# Altium PCB Insole_ver1.PcbDoc (part 1 of 2)
Units mil, origin at the board's own origin, x right, y up, seen from the top; angles counter-clockwise.
Board outline 8634.93 x 10258.5 mil, 2 copper layers (Top Layer, Bottom Layer); 254 components, 50 nets, 823 pads, 0 vias.
Unrouted connection lines stored in the file: 475.
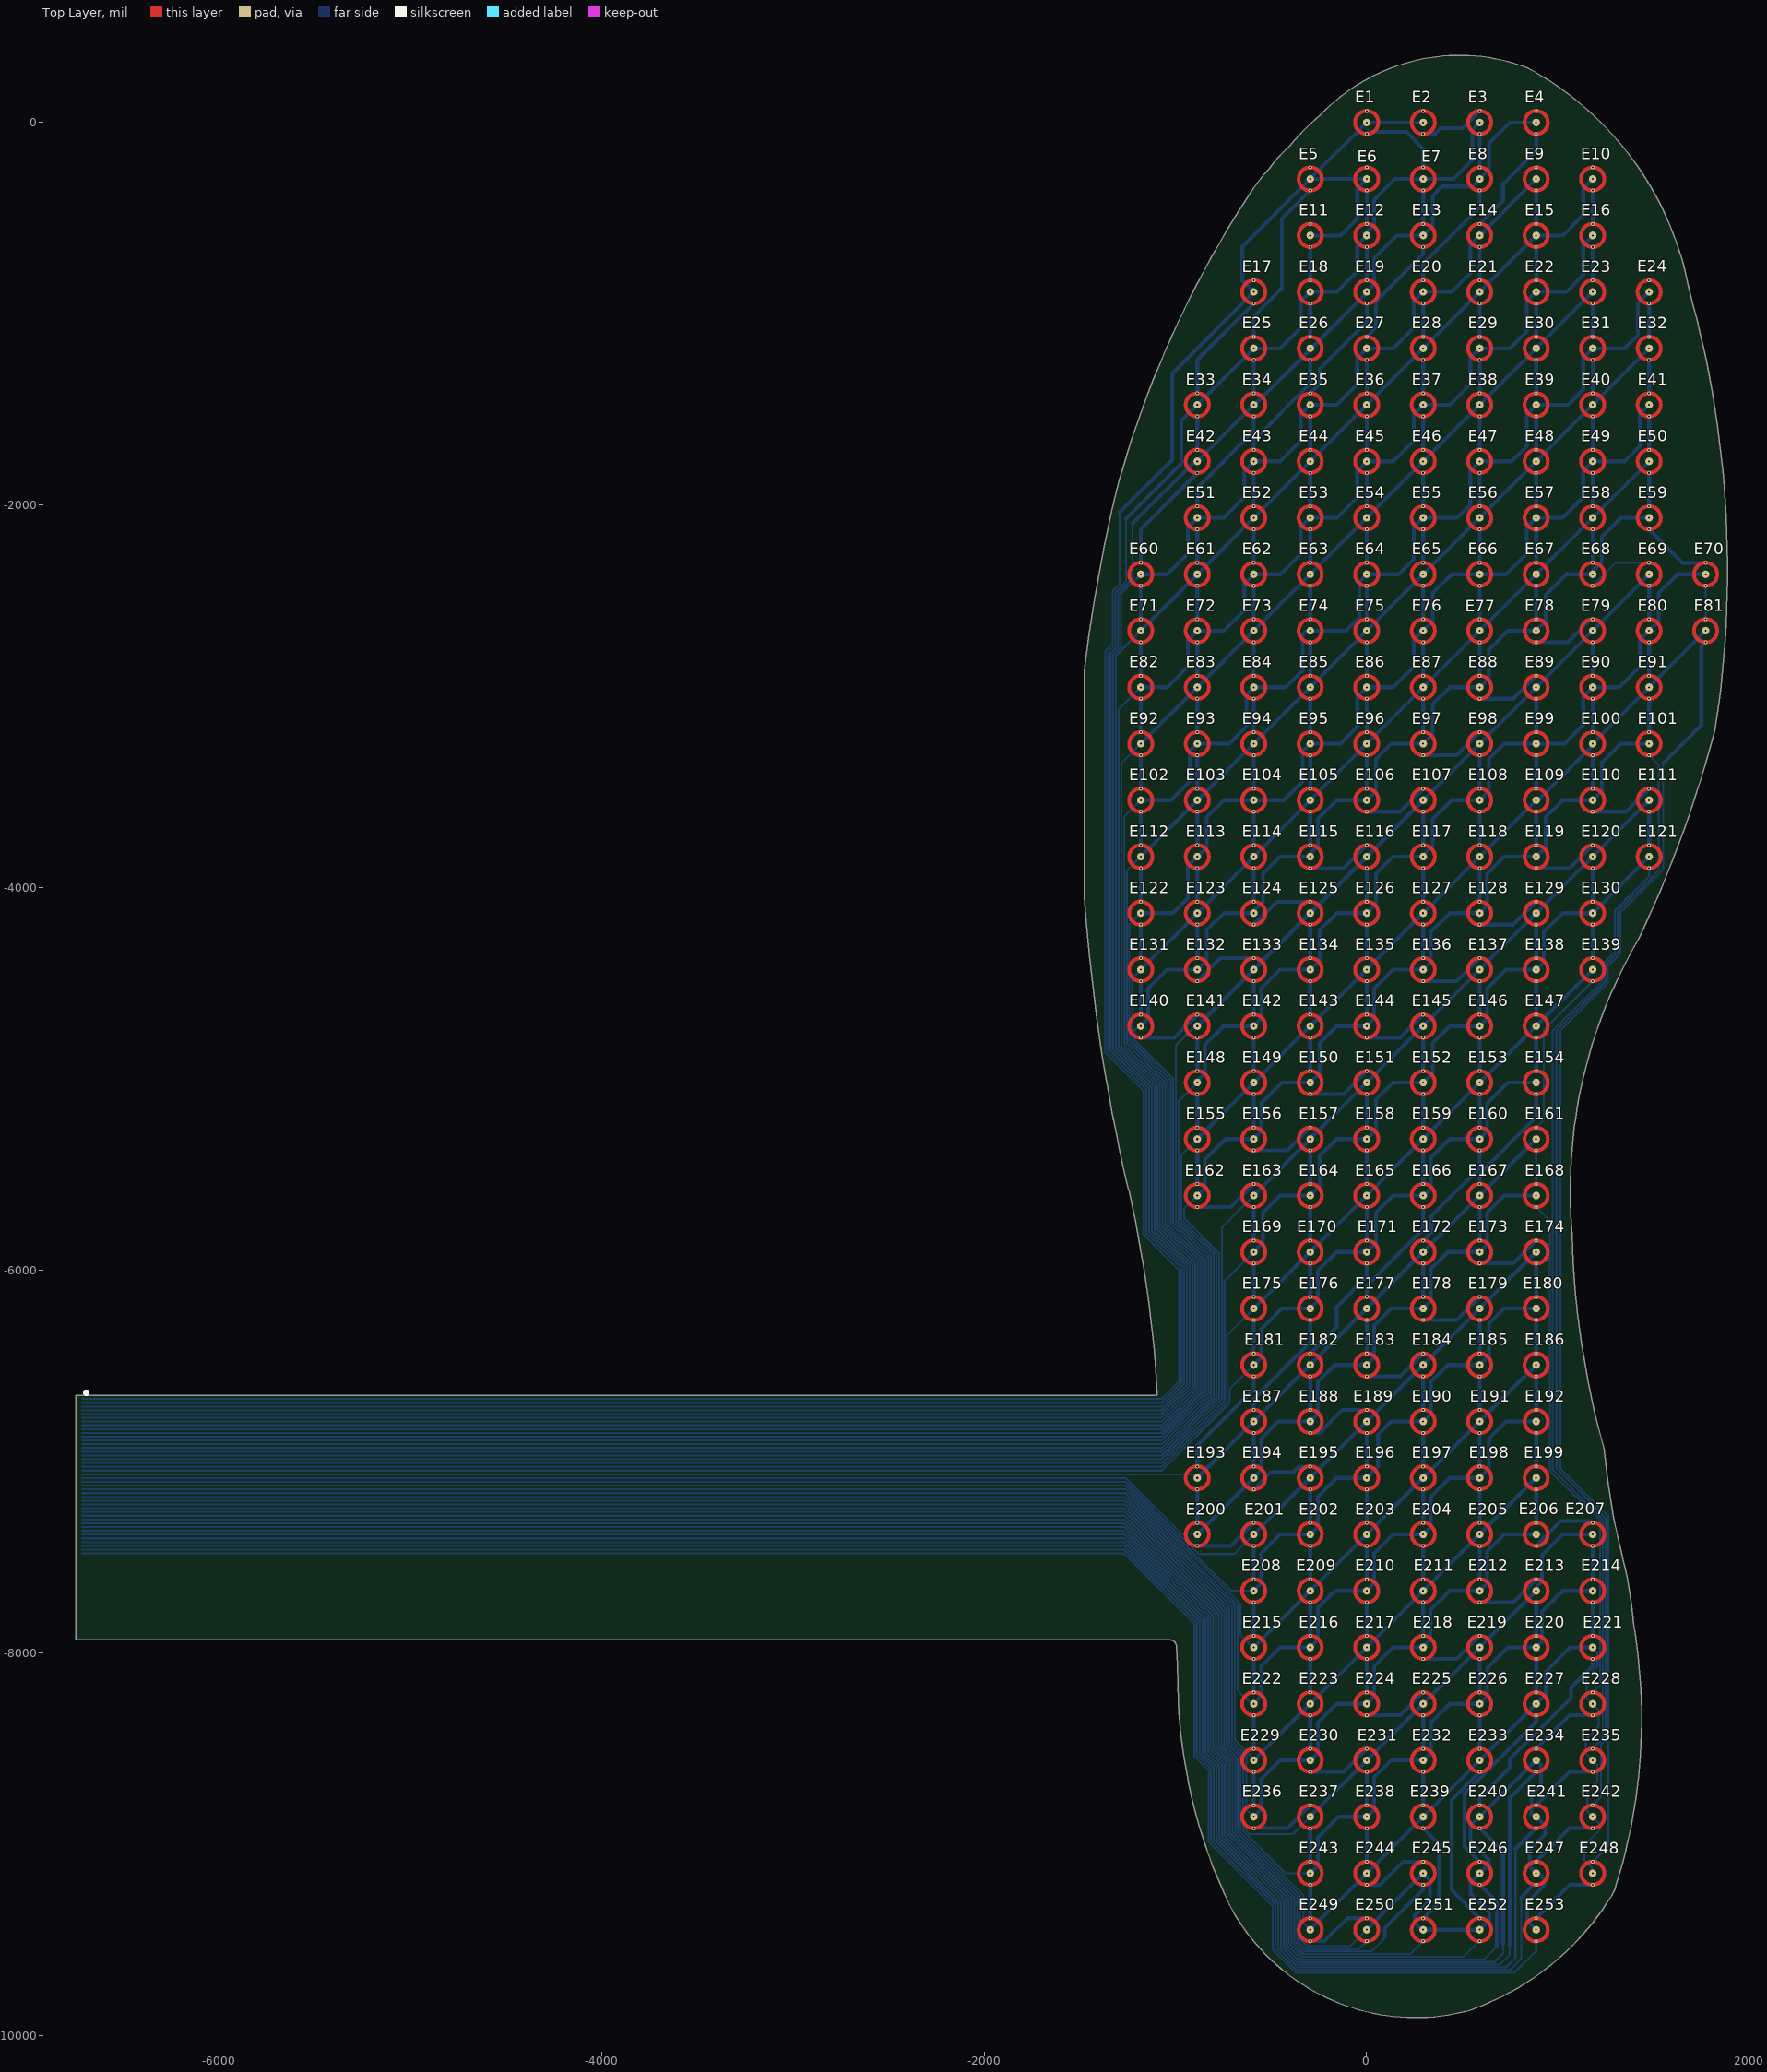
[diagram p0: Top Layer view]
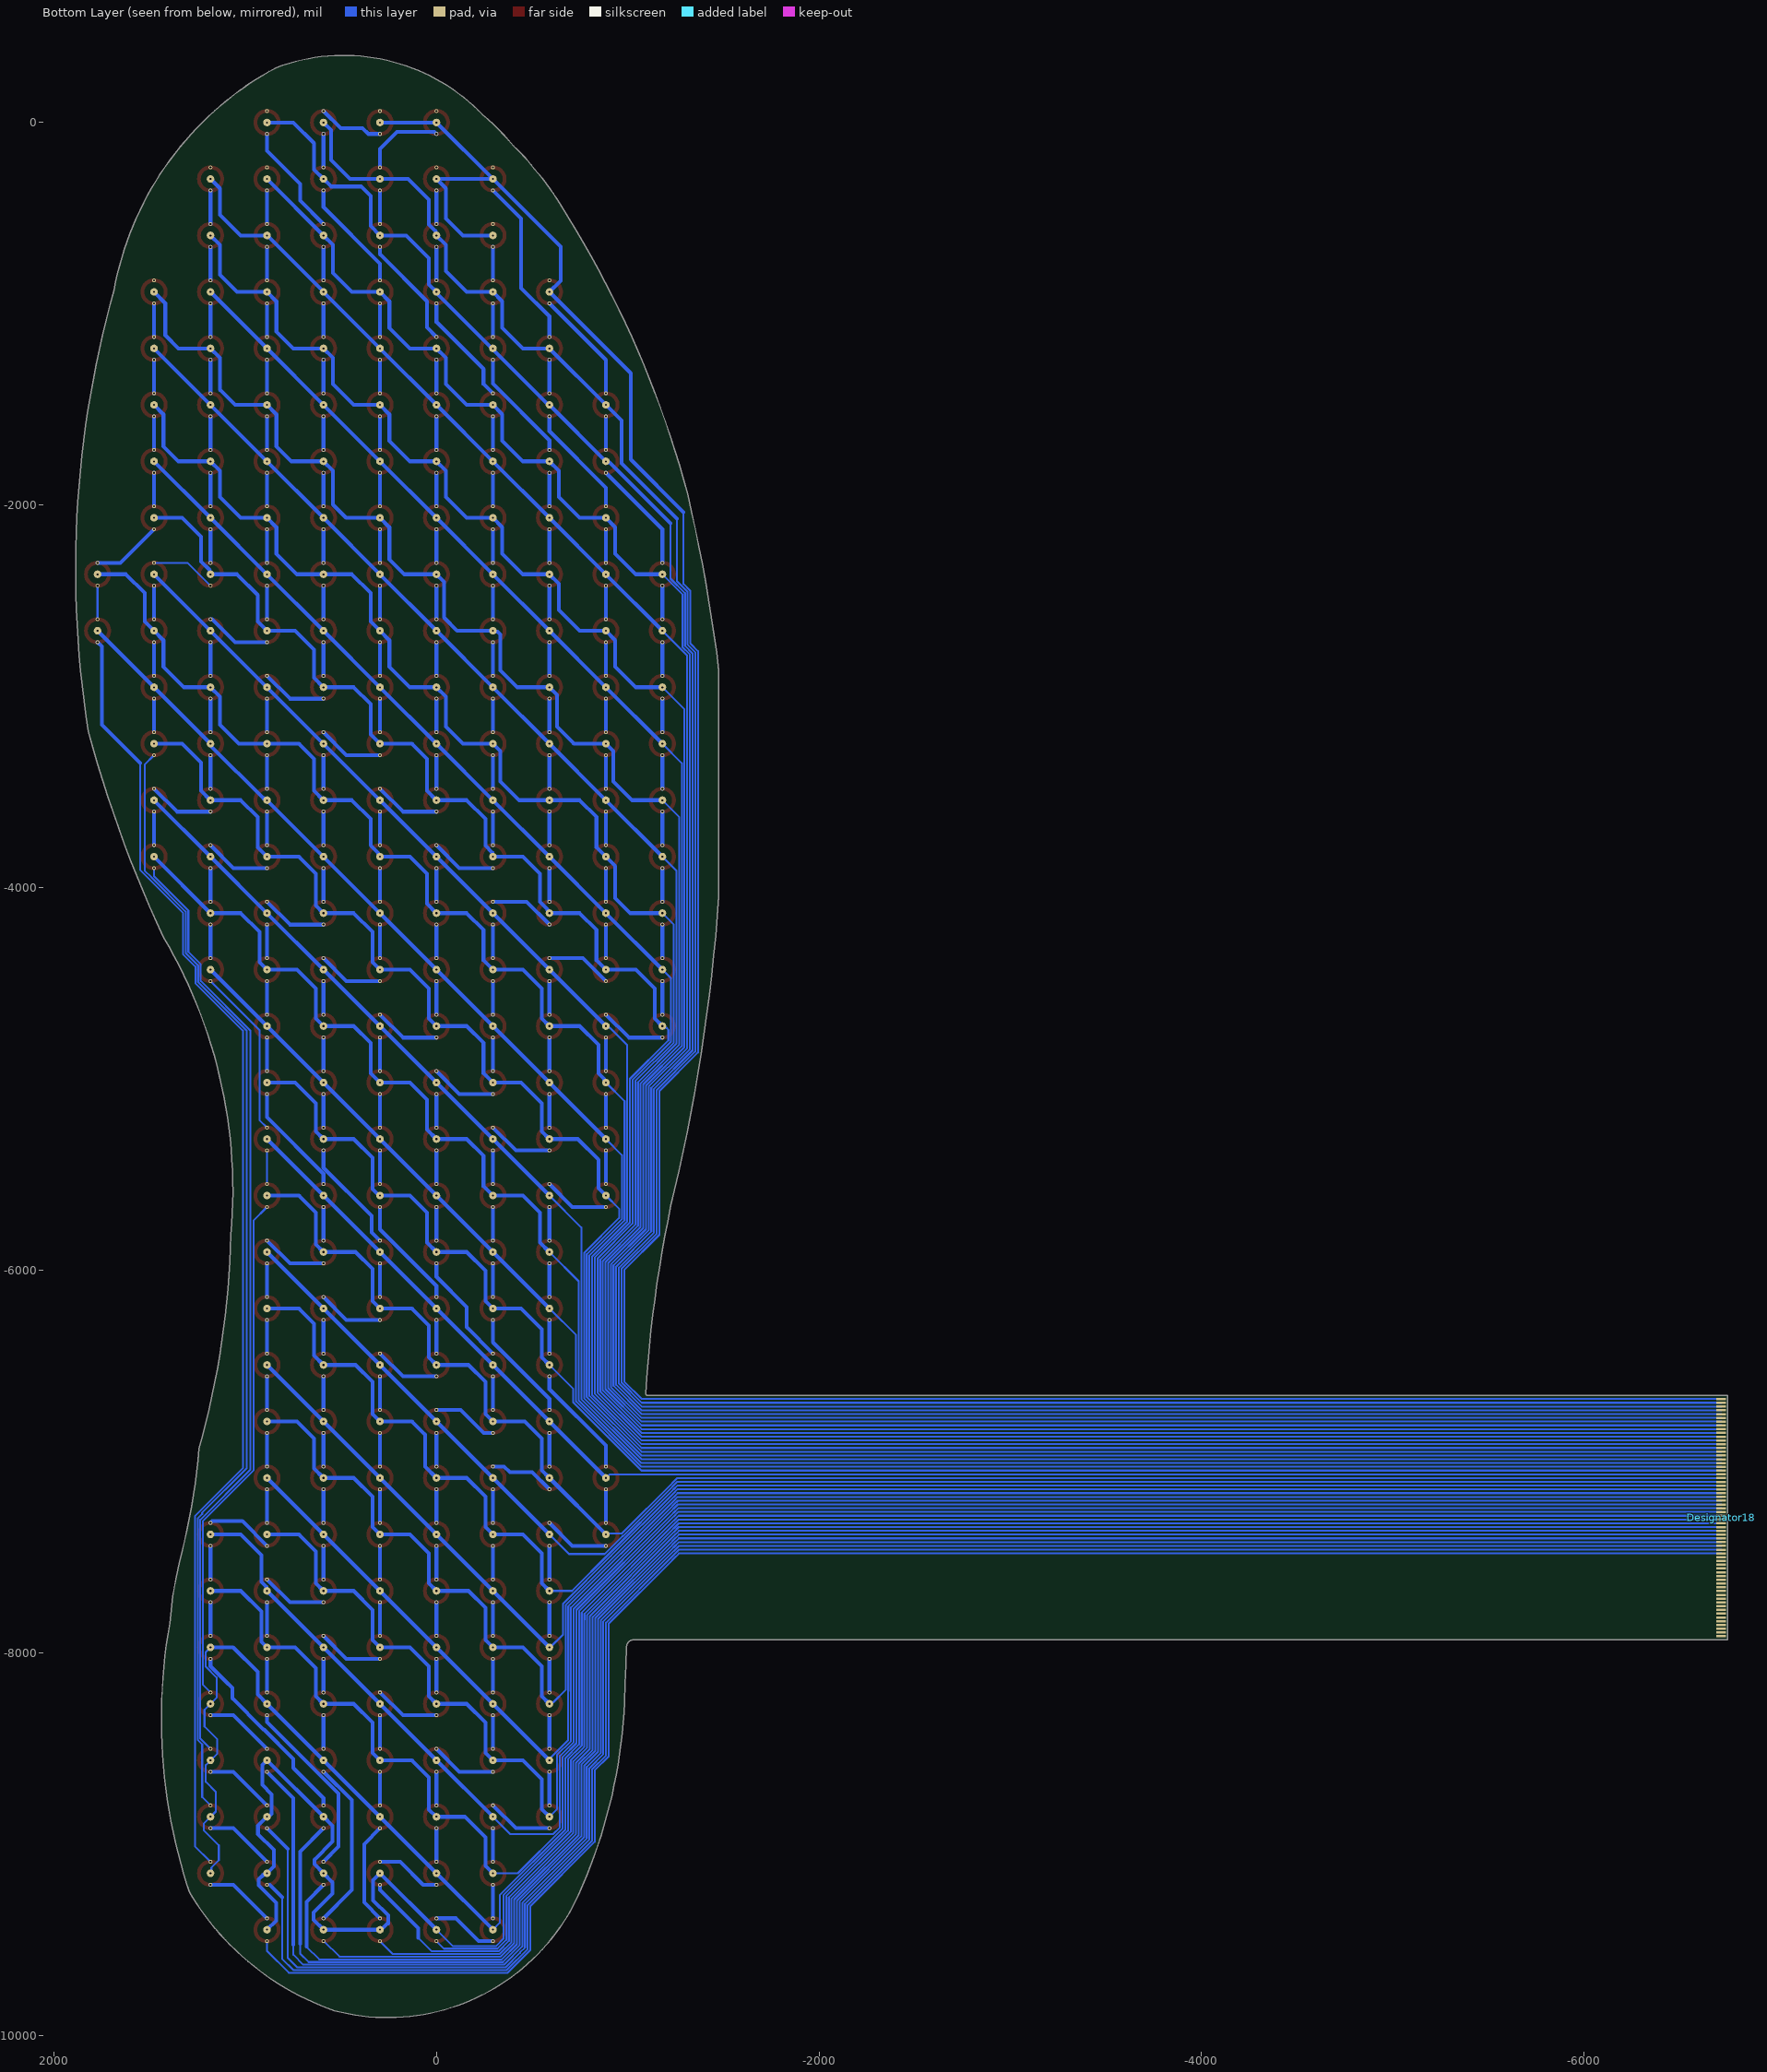
[diagram p1: Bottom Layer view, seen from below]

## Layer stack, top to bottom
Top Solder: solder mask 0.4, Solder Resist, Dk 3.5
Top Layer: signal copper 1.4
Dielectric 1: dielectric 12.6, FR-4, Dk 4.8
Bottom Layer: signal copper 1.4
Bottom Solder: solder mask 0.4, Solder Resist, Dk 3.5

## Board outline
-6749.02,-7933.46 -6749.02,-7924.29 -6749.02,-6664.33 -6749.02,-6654.33 -1100.39,-6654.33 ccw(c-1101.93,-6646.9) -1094.5,-6645.36 ccw(c-7729.36,-7029.93) -1243,-5582.02 -1244.89,-5582.15 cw(c8166.3,-3378.54) -1476.36,-4045.95 -1476.36,-2864.85 cw(c7311.45,-3944.72) -1313.08,-1942.41 cw(c3918.94,-3341.98) -645.19,-426.24 cw(c298.66,-974.06) -512.56,-244.08 cw(c175.46,-757.6) -401.59,-121.92 cw(c543.88,-896.94) -242,39.53 cw(c485.96,-656.21) 835.98,287.96 cw(c52.22,-1175.58) 1685.24,-876.42 cw(c-3527.57,-2337.08) 1819.32,-3184.24 cw(c-4531.03,-1475.13) 1426.2,-4260.7 ccw(c3666.75,-5584.92) 1074.31,-5814.86 ccw(c5587.75,-5713.61) 1240.88,-6932.71 ccw(c4856.2,-6611.73) 1331.49,-7477.73 cw(c-856.54,-8039.02) 1394.08,-7846.04 cw(c-1473.16,-8345.15) 1304.04,-9215.4 1303.8,-9215.35 cw(c1118,-9169.77) 1274.97,-9279.14 cw(c65,-8526.05) 531.52,-9872.72 cw(c255.92,-8809.73) -718.36,-9316.36 cw(c1754.38,-8132.87) -984.15,-8257.65 ccw(c-12790.3,-8516.48) -994.08,-7967.56 ccw(c-1029.84,-7969.22) -1031.5,-7933.46
board region "Layer Stack Region 1": -3866.14,-6654.33 -1261.84,-6654.33 -1275.43,-7933.47 -3854.34,-7933.47
board region "Layer Stack Region 1": -1261.84,-6654.33 -1100.39,-6654.33 -1098.97,-6653.89 -1096.52,-6652.22 -1094.9,-6649.74 -1094.34,-6646.83 -1094.5,-6645.36 -1098.73,-6578.31 -1109.21,-6444.37 -1122.4,-6310.67 -1138.29,-6177.26 -1156.87,-6044.2 -1178.14,-5911.55 -1202.09,-5779.35 -1228.7,-5647.66 -1243,-5582.02 -1244.89,-5582.15 -1267.05,-5487.51 -1307.56,-5297.37 -1344.23,-5106.45 -1377.06,-4914.83 -1406.02,-4722.59 -1431.12,-4529.81 -1452.33,-4336.56 -1469.65,-4142.92 -1476.36,-4045.95 -1476.36,-2864.85 -1469.22,-2806.71 -1453.39,-2690.63 -1436.03,-2574.77 -1417.14,-2459.15 -1396.72,-2343.79 -1374.77,-2228.71 -1351.31,-2113.92 -1326.33,-1999.46 -1313.08,-1942.41 -1295.17,-1875.45 -1255.93,-1742.51 -1213.31,-1610.61 -1167.33,-1479.85 -1118.01,-1350.3 -1065.39,-1222.06 -1009.51,-1095.21 -950.41,-969.83 -888.11,-846 -822.67,-723.81 -754.12,-603.33 -682.51,-484.65 -645.19,-426.24 -631.03,-401.83 -600.21,-354.54 -566.98,-308.91 -531.44,-265.06 -512.57,-244.08 -500.2,-227.52 -473.92,-195.62 -446.13,-165.03 -416.9,-135.81 -401.59,-121.92 -383.58,-99.94 -345.53,-57.7 -305.57,-17.27 -263.77,21.26 -242,39.53 -221.77,60.7 -178.9,100.62 -133.79,137.98 -86.59,172.66 -37.45,204.53 13.46,233.5 65.97,259.46 119.9,282.32 175.06,302.01 231.28,318.46 288.36,331.61 346.1,341.42 404.32,347.87 462.81,350.91 521.39,350.56 579.84,346.8 637.97,339.64 695.59,329.13 752.51,315.28 808.52,298.14 835.98,287.96 868.84,270.37 932.91,232.26 995.21,191.31 1055.61,147.61 1113.99,101.24 1170.23,52.3 1224.21,0.88 1275.83,-52.9 1324.99,-108.95 1371.58,-167.15 1415.51,-227.38 1456.69,-289.53 1495.04,-353.46 1530.49,-419.04 1562.95,-486.15 1592.37,-554.65 1618.69,-624.41 1641.85,-695.27 1661.81,-767.1 1678.52,-839.75 1685.24,-876.42 1704.88,-946.52 1740.38,-1087.74 1772.08,-1229.86 1799.93,-1372.78 1823.94,-1516.4 1844.07,-1660.62 1860.32,-1805.32 1872.68,-1950.41 1881.12,-2095.77 1885.65,-2241.31 1886.27,-2386.92 1882.97,-2532.5 1875.76,-2677.93 1864.64,-2823.12 1849.62,-2967.95 1830.71,-3112.33 1819.32,-3184.24 1800.68,-3253.5 1760.39,-3391.16 1717.11,-3527.91 1670.85,-3663.69 1621.65,-3798.42 1569.52,-3932.05 1514.48,-4064.51 1456.57,-4195.74 1426.2,-4260.7 1400.87,-4304.52 1352.8,-4393.59 1308.23,-4484.46 1267.23,-4576.99 1229.85,-4671.05 1196.16,-4766.49 1166.21,-4863.17 1140.04,-4960.94 1117.69,-5059.65 1099.19,-5159.16 1084.58,-5259.31 1073.87,-5359.96 1067.08,-5460.94 1064.23,-5562.11 1065.31,-5663.32 1070.33,-5764.41 1074.31,-5814.86 1075.61,-5862.06 1079.7,-5956.4 1085.77,-6050.63 1093.8,-6144.72 1103.8,-6238.61 1115.76,-6332.28 1129.68,-6425.68 1145.55,-6518.76 1163.36,-6611.5 1183.11,-6703.84 1204.78,-6795.75 1228.37,-6887.18 1240.89,-6932.71 1244.11,-6967.12 1251.53,-7035.85 1260.26,-7104.43 1270.3,-7172.82 1281.63,-7241.02 1294.27,-7308.98 1308.19,-7376.69 1323.4,-7444.13 1331.49,-7477.73 1343.11,-7523.02 1362.58,-7614.49 1378.25,-7706.69 1390.08,-7799.45 1394.08,-7846.04 1401.5,-7888.7 1413.81,-7974.41 1423.56,-8060.45 1430.75,-8146.74 1435.36,-8233.21 1437.41,-8319.78 1436.87,-8406.37 1433.76,-8492.9 1428.08,-8579.31 1419.83,-8665.51 1409.02,-8751.42 1395.66,-8836.97 1379.76,-8922.09 1361.34,-9006.7 1340.41,-9090.72 1316.98,-9174.09 1303.8,-9215.35 1301.71,-9223.9 1295.96,-9240.55 1288.7,-9256.6 1280,-9271.91 1274.97,-9279.14 1258.95,-9304.88 1224.75,-9354.94 1188.45,-9403.51 1150.12,-9450.49 1109.83,-9495.8 1067.65,-9539.35 1023.65,-9581.07 977.92,-9620.88 930.54,-9658.71 881.6,-9694.49 831.17,-9728.16 779.36,-9759.65 726.26,-9788.91 671.96,-9815.89 616.56,-9840.53 560.16,-9862.8 531.52,-9872.72 501.73,-9880.45 441.37,-9892.53 380.43,-9901.22 319.1,-9906.48 257.57,-9908.3 196.04,-9906.67 134.69,-9901.59 73.73,-9893.09 13.33,-9881.18 -46.3,-9865.91 -104.98,-9847.32 -162.53,-9825.48 -218.77,-9800.45 -273.51,-9772.31 -326.6,-9741.14 -377.85,-9707.05 -427.11,-9670.15 -474.24,-9630.54 -519.06,-9588.35 -561.46,-9543.72 -601.29,-9496.79 -638.42,-9447.7 -672.75,-9396.6 -704.16,-9343.67 -718.36,-9316.36 -738.13,-9275.06 -774.89,-9191.17 -808.83,-9106.11 -839.9,-9019.96 -868.08,-8932.82 -893.34,-8844.78 -915.64,-8755.95 -934.96,-8666.43 -951.28,-8576.31 -964.58,-8485.7 -974.84,-8394.69 -982.07,-8303.39 -984.15,-8257.65 -985,-8221.38 -987.04,-8148.84 -989.52,-8076.32 -992.45,-8003.81 -994.08,-7967.56 -994.41,-7964.07 -996.1,-7957.26 -999.08,-7950.9 -1003.25,-7945.26 -1008.43,-7940.53 -1014.44,-7936.91 -1021.04,-7934.52 -1027.98,-7933.47 -1031.5,-7933.47 -1275.43,-7933.47
board region "Layer Stack Region 1": -3854.34,-7933.47 -6749.02,-7933.47 -6749.02,-7924.29 -6749.02,-6664.33 -6749.02,-6654.33 -3866.14,-6654.33

## Design rules (kind name [scope] priority, off if disabled: settings)
Clearance [All] p1: gap=10 ignorepadtopadclearanceinfootprint=FALSE except(0: Arc-Hole Track-Hole SMDPad-Hole THPad-Hole Via-Hole Fill-Hole Poly-Hole Region-Hole Text-Hole; 4: Arc-Arc Arc-Track Track-Track)
DiffPairsRouting [All] p1: maxlimit=10 minlimit=10 mostfreqgap=10 toplayer_minwidth=15 toplayer_maxwidth=15 toplayer_prefwidth=15 bottomlayer_minwidth=15 bottomlayer_maxwidth=15 bottomlayer_prefwidth=15 substack1={6D9DD50E-99D7-4FCE-B177-F3C0DD92A880} toplayer_{6d9dd50e-99d7-4fce-b177-f3c0dd92a880}_minwidth=15 toplayer_{6d9dd50e-99d7-4fce-b177-f3c0dd92a880}_maxwidth=15 toplayer_{6d9dd50e-99d7-4fce-b177-f3c0dd92a880}_prefwidth=15 bottomlayer_{6d9dd50e-99d7-4fce-b177-f3c0dd92a880}_minwidth=15 bottomlayer_{6d9dd50e-99d7-4fce-b177-f3c0dd92a880}_maxwidth=15 bottomlayer_{6d9dd50e-99d7-4fce-b177-f3c0dd92a880}_prefwidth=15 maxuncoupledlength=500
PolygonConnect [All] p1: connectstyle=Relief reliefconductorwidth=10 reliefentries=4 polygonreliefangle="90 Angle" airgapwidth=10
RoutingVias [All] p1: holewidth=28 width=50 viastyle="Through Hole" minholewidth=28 minwidth=50 maxholewidth=28 maxwidth=50
SolderMaskExpansion [All] p1: expansion=4 istentingtop=FALSE
Width [All] p1: maxlimit=10 minlimit=10 preferedwidth=10 substack1={6D9DD50E-99D7-4FCE-B177-F3C0DD92A880}
29 further rules are at their usual default settings.

## Classes and differential pairs
net class ROUTE: Col1 Col2 Col3 Col4 Col5 Col6 Col7 Col8 Col9 Col10 Col11 Col12 Col13 Col14 Col15 Col16 Col17 Col18 Row1 Row2 Row3 Row4 Row5 Row6 Row7 Row8 Row9 Row10 Row11 Row12 Row13 Row14 Row15 Row16 Row17 Row18 Row19 Row20 Row21 Row22 Row23 Row24 Row25 Row26 Row27 Row28 Row29 Row30 Row31 Row32

## Components (designator, comment, footprint, x,y, rotation, side; value= is the part's Value field where it differs from the comment)
Designator18 "Comment" FPC0.5-WT-40P -6813.86,-7058.07 r270 top
E1 "Insole_electrode_v1" insole_electrode_v1 0,0 r0 top
E2 "Insole_electrode_v1" insole_electrode_v1 295.28,0 r0 top
E3 "Insole_electrode_v1" insole_electrode_v1 590.55,0 r0 top
E4 "Insole_electrode_v1" insole_electrode_v1 885.83,0 r0 top
E5 "Insole_electrode_v1" insole_electrode_v1 -295.28,-295.28 r0 top
E6 "Insole_electrode_v1" insole_electrode_v1 0,-295.28 r0 top
E7 "Insole_electrode_v1" insole_electrode_v1 295.28,-295.28 r0 top
E8 "Insole_electrode_v1" insole_electrode_v1 590.55,-295.28 r0 top
E9 "Insole_electrode_v1" insole_electrode_v1 885.83,-295.28 r0 top
E10 "Insole_electrode_v1" insole_electrode_v1 1181.1,-295.28 r0 top
E11 "Insole_electrode_v1" insole_electrode_v1 -295.28,-590.55 r0 top
E12 "Insole_electrode_v1" insole_electrode_v1 0,-590.55 r0 top
E13 "Insole_electrode_v1" insole_electrode_v1 295.28,-590.55 r0 top
E14 "Insole_electrode_v1" insole_electrode_v1 590.55,-590.55 r0 top
E15 "Insole_electrode_v1" insole_electrode_v1 885.83,-590.55 r0 top
E16 "Insole_electrode_v1" insole_electrode_v1 1181.1,-590.55 r0 top
E17 "Insole_electrode_v1" insole_electrode_v1 -590.55,-885.83 r0 top
E18 "Insole_electrode_v1" insole_electrode_v1 -295.28,-885.83 r0 top
E19 "Insole_electrode_v1" insole_electrode_v1 0,-885.83 r0 top
E20 "Insole_electrode_v1" insole_electrode_v1 295.28,-885.83 r0 top
E21 "Insole_electrode_v1" insole_electrode_v1 590.55,-885.83 r0 top
E22 "Insole_electrode_v1" insole_electrode_v1 885.83,-885.83 r0 top
E23 "Insole_electrode_v1" insole_electrode_v1 1181.1,-885.83 r0 top
E24 "Insole_electrode_v1" insole_electrode_v1 1476.38,-885.83 r0 top
E25 "Insole_electrode_v1" insole_electrode_v1 -590.55,-1181.1 r0 top
E26 "Insole_electrode_v1" insole_electrode_v1 -295.28,-1181.1 r0 top
E27 "Insole_electrode_v1" insole_electrode_v1 0,-1181.1 r0 top
E28 "Insole_electrode_v1" insole_electrode_v1 295.28,-1181.1 r0 top
E29 "Insole_electrode_v1" insole_electrode_v1 590.55,-1181.1 r0 top
E30 "Insole_electrode_v1" insole_electrode_v1 885.83,-1181.1 r0 top
E31 "Insole_electrode_v1" insole_electrode_v1 1181.1,-1181.1 r0 top
E32 "Insole_electrode_v1" insole_electrode_v1 1476.38,-1181.1 r0 top
E33 "Insole_electrode_v1" insole_electrode_v1 -885.83,-1476.38 r0 top
E34 "Insole_electrode_v1" insole_electrode_v1 -590.55,-1476.38 r0 top
E35 "Insole_electrode_v1" insole_electrode_v1 -295.28,-1476.38 r0 top
E36 "Insole_electrode_v1" insole_electrode_v1 0,-1476.38 r0 top
E37 "Insole_electrode_v1" insole_electrode_v1 295.28,-1476.38 r0 top
E38 "Insole_electrode_v1" insole_electrode_v1 590.55,-1476.38 r0 top
E39 "Insole_electrode_v1" insole_electrode_v1 885.83,-1476.38 r0 top
E40 "Insole_electrode_v1" insole_electrode_v1 1181.1,-1476.38 r0 top
E41 "Insole_electrode_v1" insole_electrode_v1 1476.38,-1476.38 r0 top
E42 "Insole_electrode_v1" insole_electrode_v1 -885.83,-1771.65 r0 top
E43 "Insole_electrode_v1" insole_electrode_v1 -590.55,-1771.65 r0 top
E44 "Insole_electrode_v1" insole_electrode_v1 -295.28,-1771.65 r0 top
E45 "Insole_electrode_v1" insole_electrode_v1 0,-1771.65 r0 top
E46 "Insole_electrode_v1" insole_electrode_v1 295.28,-1771.65 r0 top
E47 "Insole_electrode_v1" insole_electrode_v1 590.55,-1771.65 r0 top
E48 "Insole_electrode_v1" insole_electrode_v1 885.83,-1771.65 r0 top
E49 "Insole_electrode_v1" insole_electrode_v1 1181.1,-1771.65 r0 top
E50 "Insole_electrode_v1" insole_electrode_v1 1476.38,-1771.65 r0 top
E51 "Insole_electrode_v1" insole_electrode_v1 -885.83,-2066.93 r0 top
E52 "Insole_electrode_v1" insole_electrode_v1 -590.55,-2066.93 r0 top
E53 "Insole_electrode_v1" insole_electrode_v1 -295.28,-2066.93 r0 top
E54 "Insole_electrode_v1" insole_electrode_v1 0,-2066.93 r0 top
E55 "Insole_electrode_v1" insole_electrode_v1 295.28,-2066.93 r0 top
E56 "Insole_electrode_v1" insole_electrode_v1 590.55,-2066.93 r0 top
E57 "Insole_electrode_v1" insole_electrode_v1 885.83,-2066.93 r0 top
E58 "Insole_electrode_v1" insole_electrode_v1 1181.1,-2066.93 r0 top
E59 "Insole_electrode_v1" insole_electrode_v1 1476.38,-2066.93 r0 top
E60 "Insole_electrode_v1" insole_electrode_v1 -1181.1,-2362.2 r0 top
E61 "Insole_electrode_v1" insole_electrode_v1 -885.83,-2362.2 r0 top
E62 "Insole_electrode_v1" insole_electrode_v1 -590.55,-2362.2 r0 top
E63 "Insole_electrode_v1" insole_electrode_v1 -295.28,-2362.2 r0 top
E64 "Insole_electrode_v1" insole_electrode_v1 0,-2362.2 r0 top
E65 "Insole_electrode_v1" insole_electrode_v1 295.28,-2362.2 r0 top
E66 "Insole_electrode_v1" insole_electrode_v1 590.55,-2362.2 r0 top
E67 "Insole_electrode_v1" insole_electrode_v1 885.83,-2362.2 r0 top
E68 "Insole_electrode_v1" insole_electrode_v1 1181.1,-2362.2 r0 top
E69 "Insole_electrode_v1" insole_electrode_v1 1476.38,-2362.2 r0 top
E70 "Insole_electrode_v1" insole_electrode_v1 1771.65,-2362.2 r0 top
E71 "Insole_electrode_v1" insole_electrode_v1 -1181.1,-2657.48 r0 top
E72 "Insole_electrode_v1" insole_electrode_v1 -885.83,-2657.48 r0 top
E73 "Insole_electrode_v1" insole_electrode_v1 -590.55,-2657.48 r0 top
E74 "Insole_electrode_v1" insole_electrode_v1 -295.28,-2657.48 r0 top
E75 "Insole_electrode_v1" insole_electrode_v1 0,-2657.48 r0 top
E76 "Insole_electrode_v1" insole_electrode_v1 295.28,-2657.48 r0 top
E77 "Insole_electrode_v1" insole_electrode_v1 590.55,-2657.48 r0 top
E78 "Insole_electrode_v1" insole_electrode_v1 885.83,-2657.48 r0 top
E79 "Insole_electrode_v1" insole_electrode_v1 1181.1,-2657.48 r0 top
E80 "Insole_electrode_v1" insole_electrode_v1 1476.38,-2657.48 r0 top
E81 "Insole_electrode_v1" insole_electrode_v1 1771.65,-2657.48 r0 top
E82 "Insole_electrode_v1" insole_electrode_v1 -1181.1,-2952.76 r0 top
E83 "Insole_electrode_v1" insole_electrode_v1 -885.83,-2952.76 r0 top
E84 "Insole_electrode_v1" insole_electrode_v1 -590.55,-2952.76 r0 top
E85 "Insole_electrode_v1" insole_electrode_v1 -295.28,-2952.76 r0 top
E86 "Insole_electrode_v1" insole_electrode_v1 0,-2952.76 r0 top
E87 "Insole_electrode_v1" insole_electrode_v1 295.28,-2952.76 r0 top
E88 "Insole_electrode_v1" insole_electrode_v1 590.55,-2952.76 r0 top
E89 "Insole_electrode_v1" insole_electrode_v1 885.83,-2952.76 r0 top
E90 "Insole_electrode_v1" insole_electrode_v1 1181.1,-2952.76 r0 top
E91 "Insole_electrode_v1" insole_electrode_v1 1476.38,-2952.76 r0 top
E92 "Insole_electrode_v1" insole_electrode_v1 -1181.1,-3248.03 r0 top
E93 "Insole_electrode_v1" insole_electrode_v1 -885.83,-3248.03 r0 top
E94 "Insole_electrode_v1" insole_electrode_v1 -590.55,-3248.03 r0 top
E95 "Insole_electrode_v1" insole_electrode_v1 -295.28,-3248.03 r0 top
E96 "Insole_electrode_v1" insole_electrode_v1 0,-3248.03 r0 top
E97 "Insole_electrode_v1" insole_electrode_v1 295.28,-3248.03 r0 top
E98 "Insole_electrode_v1" insole_electrode_v1 590.55,-3248.03 r0 top
E99 "Insole_electrode_v1" insole_electrode_v1 885.83,-3248.03 r0 top
E100 "Insole_electrode_v1" insole_electrode_v1 1181.1,-3248.03 r0 top
E101 "Insole_electrode_v1" insole_electrode_v1 1476.38,-3248.03 r0 top
E102 "Insole_electrode_v1" insole_electrode_v1 -1181.1,-3543.31 r0 top
E103 "Insole_electrode_v1" insole_electrode_v1 -885.83,-3543.31 r0 top
E104 "Insole_electrode_v1" insole_electrode_v1 -590.55,-3543.31 r0 top
E105 "Insole_electrode_v1" insole_electrode_v1 -295.28,-3543.31 r0 top
E106 "Insole_electrode_v1" insole_electrode_v1 0,-3543.31 r0 top
E107 "Insole_electrode_v1" insole_electrode_v1 295.28,-3543.31 r0 top
E108 "Insole_electrode_v1" insole_electrode_v1 590.55,-3543.31 r0 top
E109 "Insole_electrode_v1" insole_electrode_v1 885.83,-3543.31 r0 top
E110 "Insole_electrode_v1" insole_electrode_v1 1181.1,-3543.31 r0 top
E111 "Insole_electrode_v1" insole_electrode_v1 1476.38,-3543.31 r0 top
E112 "Insole_electrode_v1" insole_electrode_v1 -1181.1,-3838.58 r0 top
E113 "Insole_electrode_v1" insole_electrode_v1 -885.83,-3838.58 r0 top
E114 "Insole_electrode_v1" insole_electrode_v1 -590.55,-3838.58 r0 top
E115 "Insole_electrode_v1" insole_electrode_v1 -295.28,-3838.58 r0 top
E116 "Insole_electrode_v1" insole_electrode_v1 0,-3838.58 r0 top
E117 "Insole_electrode_v1" insole_electrode_v1 295.28,-3838.58 r0 top
E118 "Insole_electrode_v1" insole_electrode_v1 590.55,-3838.58 r0 top
E119 "Insole_electrode_v1" insole_electrode_v1 885.83,-3838.58 r0 top
E120 "Insole_electrode_v1" insole_electrode_v1 1181.1,-3838.58 r0 top
E121 "Insole_electrode_v1" insole_electrode_v1 1476.38,-3838.58 r0 top
E122 "Insole_electrode_v1" insole_electrode_v1 -1181.1,-4133.86 r0 top
E123 "Insole_electrode_v1" insole_electrode_v1 -885.83,-4133.86 r0 top
E124 "Insole_electrode_v1" insole_electrode_v1 -590.55,-4133.86 r0 top
E125 "Insole_electrode_v1" insole_electrode_v1 -295.28,-4133.86 r0 top
E126 "Insole_electrode_v1" insole_electrode_v1 0,-4133.86 r0 top
E127 "Insole_electrode_v1" insole_electrode_v1 295.28,-4133.86 r0 top
E128 "Insole_electrode_v1" insole_electrode_v1 590.55,-4133.86 r0 top
E129 "Insole_electrode_v1" insole_electrode_v1 885.83,-4133.86 r0 top
E130 "Insole_electrode_v1" insole_electrode_v1 1181.1,-4133.86 r0 top
E131 "Insole_electrode_v1" insole_electrode_v1 -1181.1,-4429.13 r0 top
E132 "Insole_electrode_v1" insole_electrode_v1 -885.83,-4429.13 r0 top
E133 "Insole_electrode_v1" insole_electrode_v1 -590.55,-4429.13 r0 top
E134 "Insole_electrode_v1" insole_electrode_v1 -295.28,-4429.13 r0 top
E135 "Insole_electrode_v1" insole_electrode_v1 0,-4429.13 r0 top
E136 "Insole_electrode_v1" insole_electrode_v1 295.28,-4429.13 r0 top
E137 "Insole_electrode_v1" insole_electrode_v1 590.55,-4429.13 r0 top
E138 "Insole_electrode_v1" insole_electrode_v1 885.83,-4429.13 r0 top
E139 "Insole_electrode_v1" insole_electrode_v1 1181.1,-4429.13 r0 top
E140 "Insole_electrode_v1" insole_electrode_v1 -1181.1,-4724.41 r0 top
E141 "Insole_electrode_v1" insole_electrode_v1 -885.83,-4724.41 r0 top
E142 "Insole_electrode_v1" insole_electrode_v1 -590.55,-4724.41 r0 top
E143 "Insole_electrode_v1" insole_electrode_v1 -295.28,-4724.41 r0 top
E144 "Insole_electrode_v1" insole_electrode_v1 0,-4724.41 r0 top
E145 "Insole_electrode_v1" insole_electrode_v1 295.28,-4724.41 r0 top
E146 "Insole_electrode_v1" insole_electrode_v1 590.55,-4724.41 r0 top
E147 "Insole_electrode_v1" insole_electrode_v1 885.83,-4724.41 r0 top
E148 "Insole_electrode_v1" insole_electrode_v1 -885.83,-5019.69 r0 top
E149 "Insole_electrode_v1" insole_electrode_v1 -590.55,-5019.69 r0 top
E150 "Insole_electrode_v1" insole_electrode_v1 -295.28,-5019.69 r0 top
E151 "Insole_electrode_v1" insole_electrode_v1 0,-5019.69 r0 top
E152 "Insole_electrode_v1" insole_electrode_v1 295.28,-5019.69 r0 top
E153 "Insole_electrode_v1" insole_electrode_v1 590.55,-5019.69 r0 top
E154 "Insole_electrode_v1" insole_electrode_v1 885.83,-5019.69 r0 top
E155 "Insole_electrode_v1" insole_electrode_v1 -885.83,-5314.96 r0 top
E156 "Insole_electrode_v1" insole_electrode_v1 -590.55,-5314.96 r0 top
E157 "Insole_electrode_v1" insole_electrode_v1 -295.28,-5314.96 r0 top
E158 "Insole_electrode_v1" insole_electrode_v1 0,-5314.96 r0 top
E159 "Insole_electrode_v1" insole_electrode_v1 295.28,-5314.96 r0 top
E160 "Insole_electrode_v1" insole_electrode_v1 590.55,-5314.96 r0 top
E161 "Insole_electrode_v1" insole_electrode_v1 885.83,-5314.96 r0 top
E162 "Insole_electrode_v1" insole_electrode_v1 -885.83,-5610.24 r0 top (schematic designator E271)
E163 "Insole_electrode_v1" insole_electrode_v1 -590.55,-5610.24 r0 top
E164 "Insole_electrode_v1" insole_electrode_v1 -295.28,-5610.24 r0 top
E165 "Insole_electrode_v1" insole_electrode_v1 0,-5610.24 r0 top
E166 "Insole_electrode_v1" insole_electrode_v1 295.28,-5610.24 r0 top
E167 "Insole_electrode_v1" insole_electrode_v1 590.55,-5610.24 r0 top
E168 "Insole_electrode_v1" insole_electrode_v1 885.83,-5610.24 r0 top
E169 "Insole_electrode_v1" insole_electrode_v1 -590.55,-5905.51 r0 top (schematic designator E170)
E170 "Insole_electrode_v1" insole_electrode_v1 -295.28,-5905.51 r0 top (schematic designator E171)
E171 "Insole_electrode_v1" insole_electrode_v1 0,-5905.51 r0 top (schematic designator E172)
E172 "Insole_electrode_v1" insole_electrode_v1 295.28,-5905.51 r0 top (schematic designator E173)
E173 "Insole_electrode_v1" insole_electrode_v1 590.55,-5905.51 r0 top (schematic designator E174)
E174 "Insole_electrode_v1" insole_electrode_v1 885.83,-5905.51 r0 top (schematic designator E175)
E175 "Insole_electrode_v1" insole_electrode_v1 -590.55,-6200.79 r0 top (schematic designator E176)
E176 "Insole_electrode_v1" insole_electrode_v1 -295.28,-6200.79 r0 top (schematic designator E177)
E177 "Insole_electrode_v1" insole_electrode_v1 0,-6200.79 r0 top (schematic designator E178)
E178 "Insole_electrode_v1" insole_electrode_v1 295.28,-6200.79 r0 top (schematic designator E179)
E179 "Insole_electrode_v1" insole_electrode_v1 590.55,-6200.79 r0 top (schematic designator E180)
E180 "Insole_electrode_v1" insole_electrode_v1 885.83,-6200.79 r0 top (schematic designator E181)
E181 "Insole_electrode_v1" insole_electrode_v1 -590.55,-6496.06 r0 top (schematic designator E182)
E182 "Insole_electrode_v1" insole_electrode_v1 -295.28,-6496.06 r0 top (schematic designator E183)
E183 "Insole_electrode_v1" insole_electrode_v1 0,-6496.06 r0 top (schematic designator E184)
E184 "Insole_electrode_v1" insole_electrode_v1 295.28,-6496.06 r0 top (schematic designator E185)
E185 "Insole_electrode_v1" insole_electrode_v1 590.55,-6496.06 r0 top (schematic designator E186)
E186 "Insole_electrode_v1" insole_electrode_v1 885.83,-6496.06 r0 top (schematic designator E187)
E187 "Insole_electrode_v1" insole_electrode_v1 -590.55,-6791.34 r0 top (schematic designator E189)
E188 "Insole_electrode_v1" insole_electrode_v1 -295.28,-6791.34 r0 top (schematic designator E190)
E189 "Insole_electrode_v1" insole_electrode_v1 0,-6791.34 r0 top (schematic designator E191)
E190 "Insole_electrode_v1" insole_electrode_v1 295.28,-6791.34 r0 top (schematic designator E192)
E191 "Insole_electrode_v1" insole_electrode_v1 590.55,-6791.34 r0 top (schematic designator E193)
E192 "Insole_electrode_v1" insole_electrode_v1 885.83,-6791.34 r0 top (schematic designator E194)
E193 "Insole_electrode_v1" insole_electrode_v1 -885.83,-7086.61 r0 top (schematic designator E195)
E194 "Insole_electrode_v1" insole_electrode_v1 -590.55,-7086.61 r0 top (schematic designator E196)
E195 "Insole_electrode_v1" insole_electrode_v1 -295.28,-7086.61 r0 top (schematic designator E197)
E196 "Insole_electrode_v1" insole_electrode_v1 0,-7086.61 r0 top (schematic designator E198)
E197 "Insole_electrode_v1" insole_electrode_v1 295.28,-7086.61 r0 top (schematic designator E199)
E198 "Insole_electrode_v1" insole_electrode_v1 590.55,-7086.61 r0 top (schematic designator E200)
E199 "Insole_electrode_v1" insole_electrode_v1 885.83,-7086.61 r0 top (schematic designator E201)
E200 "Insole_electrode_v1" insole_electrode_v1 -885.83,-7381.89 r0 top (schematic designator E202)
E201 "Insole_electrode_v1" insole_electrode_v1 -590.55,-7381.89 r0 top (schematic designator E203)
E202 "Insole_electrode_v1" insole_electrode_v1 -295.28,-7381.89 r0 top (schematic designator E204)
E203 "Insole_electrode_v1" insole_electrode_v1 0,-7381.89 r0 top (schematic designator E205)
E204 "Insole_electrode_v1" insole_electrode_v1 295.28,-7381.89 r0 top (schematic designator E206)
E205 "Insole_electrode_v1" insole_electrode_v1 590.55,-7381.89 r0 top (schematic designator E207)
E206 "Insole_electrode_v1" insole_electrode_v1 885.83,-7381.89 r0 top (schematic designator E208)
E207 "Insole_electrode_v1" insole_electrode_v1 1181.1,-7381.89 r0 top (schematic designator E209)
E208 "Insole_electrode_v1" insole_electrode_v1 -590.55,-7677.17 r0 top (schematic designator E210)
E209 "Insole_electrode_v1" insole_electrode_v1 -295.28,-7677.17 r0 top (schematic designator E211)
E210 "Insole_electrode_v1" insole_electrode_v1 0,-7677.17 r0 top (schematic designator E212)
E211 "Insole_electrode_v1" insole_electrode_v1 295.28,-7677.17 r0 top (schematic designator E213)
E212 "Insole_electrode_v1" insole_electrode_v1 590.55,-7677.17 r0 top (schematic designator E214)
E213 "Insole_electrode_v1" insole_electrode_v1 885.83,-7677.17 r0 top (schematic designator E215)
E214 "Insole_electrode_v1" insole_electrode_v1 1181.1,-7677.17 r0 top (schematic designator E216)
E215 "Insole_electrode_v1" insole_electrode_v1 -590.55,-7972.44 r0 top (schematic designator E217)
E216 "Insole_electrode_v1" insole_electrode_v1 -295.28,-7972.44 r0 top (schematic designator E218)
E217 "Insole_electrode_v1" insole_electrode_v1 0,-7972.44 r0 top (schematic designator E219)
E218 "Insole_electrode_v1" insole_electrode_v1 295.28,-7972.44 r0 top (schematic designator E220)
E219 "Insole_electrode_v1" insole_electrode_v1 590.55,-7972.44 r0 top (schematic designator E221)
E220 "Insole_electrode_v1" insole_electrode_v1 885.83,-7972.44 r0 top (schematic designator E222)
E221 "Insole_electrode_v1" insole_electrode_v1 1181.1,-7972.44 r0 top (schematic designator E223)
E222 "Insole_electrode_v1" insole_electrode_v1 -590.55,-8267.72 r0 top (schematic designator E224)
E223 "Insole_electrode_v1" insole_electrode_v1 -295.28,-8267.72 r0 top (schematic designator E225)
E224 "Insole_electrode_v1" insole_electrode_v1 0,-8267.72 r0 top (schematic designator E226)
E225 "Insole_electrode_v1" insole_electrode_v1 295.28,-8267.72 r0 top (schematic designator E227)
E226 "Insole_electrode_v1" insole_electrode_v1 590.55,-8267.72 r0 top (schematic designator E228)
E227 "Insole_electrode_v1" insole_electrode_v1 885.83,-8267.72 r0 top (schematic designator E229)
E228 "Insole_electrode_v1" insole_electrode_v1 1181.1,-8267.72 r0 top (schematic designator E230)
E229 "Insole_electrode_v1" insole_electrode_v1 -590.55,-8562.99 r0 top (schematic designator E231)
E230 "Insole_electrode_v1" insole_electrode_v1 -295.28,-8562.99 r0 top (schematic designator E232)
E231 "Insole_electrode_v1" insole_electrode_v1 0,-8562.99 r0 top (schematic designator E233)
E232 "Insole_electrode_v1" insole_electrode_v1 295.28,-8562.99 r0 top (schematic designator E234)
E233 "Insole_electrode_v1" insole_electrode_v1 590.55,-8562.99 r0 top (schematic designator E235)
E234 "Insole_electrode_v1" insole_electrode_v1 885.83,-8562.99 r0 top (schematic designator E236)
E235 "Insole_electrode_v1" insole_electrode_v1 1181.1,-8562.99 r0 top (schematic designator E237)
E236 "Insole_electrode_v1" insole_electrode_v1 -590.55,-8858.27 r0 top (schematic designator E238)
E237 "Insole_electrode_v1" insole_electrode_v1 -295.28,-8858.27 r0 top (schematic designator E239)
E238 "Insole_electrode_v1" insole_electrode_v1 0,-8858.27 r0 top (schematic designator E240)
E239 "Insole_electrode_v1" insole_electrode_v1 295.28,-8858.27 r0 top (schematic designator E241)
E240 "Insole_electrode_v1" insole_electrode_v1 590.55,-8858.27 r0 top (schematic designator E242)
E241 "Insole_electrode_v1" insole_electrode_v1 885.83,-8858.27 r0 top (schematic designator E243)
E242 "Insole_electrode_v1" insole_electrode_v1 1181.1,-8858.27 r0 top (schematic designator E244)
E243 "Insole_electrode_v1" insole_electrode_v1 -295.28,-9153.54 r0 top (schematic designator E246)
E244 "Insole_electrode_v1" insole_electrode_v1 0,-9153.54 r0 top (schematic designator E247)
E245 "Insole_electrode_v1" insole_electrode_v1 295.28,-9153.54 r0 top (schematic designator E248)
E246 "Insole_electrode_v1" insole_electrode_v1 590.55,-9153.54 r0 top (schematic designator E249)
E247 "Insole_electrode_v1" insole_electrode_v1 885.83,-9153.54 r0 top (schematic designator E250)
E248 "Insole_electrode_v1" insole_electrode_v1 1181.1,-9153.54 r0 top (schematic designator E251)
E249 "Insole_electrode_v1" insole_electrode_v1 -295.28,-9448.82 r0 top (schematic designator E252)
E250 "Insole_electrode_v1" insole_electrode_v1 0,-9448.82 r0 top (schematic designator E253)
E251 "Insole_electrode_v1" insole_electrode_v1 295.28,-9448.82 r0 top (schematic designator E254)
E252 "Insole_electrode_v1" insole_electrode_v1 590.55,-9448.82 r0 top (schematic designator E255)
E253 "Insole_electrode_v1" insole_electrode_v1 885.83,-9448.82 r0 top (schematic designator E256)

## Footprints (in the part's own frame and the unit in brackets; to place one, negate y for a bottom-side part, rotate by r counter-clockwise, add the part's x,y. Pads: shape width x height; smd on the part's side, far side on the other; paste and mask are expansions set on the pad)
FPC0.5-WT-40P [mm] "长：24.2mm，宽：5.2mm，高：2mm               黄晶宝石"
  rect 0.3x1.3 smd far side: 1(-9.75,2.497) 2(-9.25,2.497) 3(-8.75,2.497) 4(-8.25,2.497) 5(-7.75,2.497) 6(-7.25,2.497) 7(-6.75,2.497) 8(-6.25,2.497) 9(-5.75,2.497) 10(-5.25,2.497) 11(-4.75,2.497) 12(-4.25,2.497) 13(-3.75,2.497) 14(-3.25,2.497) 15(-2.75,2.497) 16(-2.25,2.497) 17(-1.75,2.497) 18(-1.25,2.497) 19(-0.75,2.497) 20(-0.25,2.497) 21(0.25,2.497) 22(0.75,2.497) 23(1.25,2.497) 24(1.75,2.497) 25(2.25,2.497) 26(2.75,2.497) 27(3.25,2.497) 28(3.75,2.497) 29(4.25,2.497) 30(4.75,2.497) 31(5.25,2.497) 32(5.75,2.497) 33(6.25,2.497) 34(6.75,2.497) 35(7.25,2.497) 36(7.75,2.497) 37(8.25,2.497) 38(8.75,2.497) 39(9.25,2.497) 40(9.75,2.497) 41(10.25,2.497) 42(10.75,2.497) 43(11.25,2.497) 44(11.75,2.497) 45(12.25,2.497) 46(12.75,2.497) 47(13.25,2.497) 48(13.75,2.497) 49(14.25,2.497) 50(14.75,2.497) 51(15.25,2.497) 52(15.75,2.497) 53(16.25,2.497) 54(16.75,2.497) 55(17.25,2.497) 56(17.75,2.497) 57(18.25,2.497) 58(18.75,2.497) 59(19.25,2.497) 60(19.75,2.497) 61(20.25,2.497) 62(20.75,2.497) 63(21.25,2.497) 64(21.75,2.497)
  silkscreen extent -10.77,2.87 -10.41,3.23
insole_electrode_v1 [mm]
  round 1 hole 0.25: 0(0,0)
  round 0.5 hole 0.25: 1(0,-1.524) 1(0,1.524)
  Top Layer circle w0.5: c0,0 r1.54

## Part data
E1 E2 E3 E4 E5 E6 E7 E8 E9 E10 E11 E12 E13 E14 E15 E16 E17 E18 E19 E20 E21 E22 E23 E24 E25 E26 E27 E28 E29 E30 E31 E32 E33 E34 E35 E36 E37 E38 E39 E40 E41 E42 E43 E44 E45 E46 E47 E48 E49 E50 E51 E52 E53 E54 E55 E56 E57 E58 E59 E60 E61 E62 E63 E64 E65 E66 E67 E68 E69 E70 E71 E72 E73 E74 E75 E76 E77 E78 E79 E80 E81 E82 E83 E84 E85 E86 E87 E88 E89 E90 E91 E92 E93 E94 E95 E96 E97 E98 E99 E100 E101 E102 E103 E104 E105 E106 E107 E108 E109 E110 E111 E112 E113 E114 E115 E116 E117 E118 E119 E120 E121 E122 E123 E124 E125 E126 E127 E128 E129 E130 E131 E132 E133 E134 E135 E136 E137 E138 E139 E140 E141 E142 E143 E144 E145 E146 E147 E148 E149 E150 E151 E152 E153 E154 E155 E156 E157 E158 E159 E160 E161 E162 E163 E164 E165 E166 E167 E168 E169 E170 E171 E172 E173 E174 E175 E176 E177 E178 E179 E180 E181 E182 E183 E184 E185 E186 E187 E188 E189 E190 E191 E192 E193 E194 E195 E196 E197 E198 E199 E200 E201 E202 E203 E204 E205 E206 E207 E208 E209 E210 E211 E212 E213 E214 E215 E216 E217 E218 E219 E220 E221 E222 E223 E224 E225 E226 E227 E228 E229 E230 E231 E232 E233 E234 E235 E236 E237 E238 E239 E240 E241 E242 E243 E244 E245 E246 E247 E248 E249 E250 E251 E252 E253: library part CMP-065-000001-1, Component Type=Standard, Design Item ID=Insole_electrode_v1, Pin Count=2, Source="Sheet1_sensor_mat_inso_v1 1.SCHLIB"

## Nets (pads, with @x,y where several pads share a name; then routed paths per layer and width w, separated by ;. In a path a pad name is that pad's centre, name@x,y a point inside that pad or via, vN(x,y) a via of type N, cw(c..) or ccw(c..) an arc to the next point about the centre after c; other vN are vias at no path point)
Col1: Designator18.33 E17.1 E33.1 E42.1 E60.1 E71.1 E82.1 E92.1 E102.1 E112.1 E122.1 E131.1 E140.1 E141.1 E148.1 E155.1 E162.1 E163.1 E169.1 E175.1 E181.1 E193.1 E200.1 E201.1 E208.1 E215.1 E222.1 E229.1 E236.1 E237.1 E243.1 E249.1 E250.1 | length 15954.6
  Bottom Layer w10: Designator18.33@-6715.55,-7304.13 -1266.73,-7304.13 -773.77,-7797.1 -773.77,-7827.63 -773.42,-7827.98 -773.42,-8491.52 -701.67,-8563.27 -701.67,-8936.58 -364.39,-9273.86 -364.39,-9501.86 -318.59,-9547.66 -38.84,-9547.66 E250.1@0,-9508.82
  Bottom Layer w19.68: E140.1@-1181.1,-4784.41 -1005.83,-4784.41 E141.1@-885.83,-4664.41 ; E140.1@-1181.1,-4664.41 E131.1@-1181.1,-4489.13 ; E131.1@-1181.1,-4369.13 E122.1@-1181.1,-4193.86 ; E122.1@-1181.1,-4073.86 E112.1@-1181.1,-3898.58 ; E112.1@-1181.1,-3778.58 E102.1@-1181.1,-3603.31 ; E102.1@-1181.1,-3483.31 E92.1@-1181.1,-3308.03 ; E92.1@-1181.1,-3188.03 E82.1@-1181.1,-3012.76 ; E82.1@-1181.1,-2892.76 E71.1@-1181.1,-2717.48 ; E71.1@-1181.1,-2597.48 E60.1@-1181.1,-2422.2 ; E60.1@-1181.1,-2302.2 -1181.1,-2126.93 E42.1@-885.83,-1831.65 ; E200.1@-885.83,-7441.89 -710.55,-7441.89 E201.1@-590.55,-7321.89 ; E200.1@-885.83,-7321.89 E193.1@-885.83,-7146.61 ; E193.1@-885.83,-7026.61 -885.83,-6917.32 -590.55,-6622.05 E181.1@-590.55,-6556.06 ; E162.1@-885.83,-5670.24 -710.55,-5670.24 E163.1@-590.55,-5550.24 ; E162.1@-885.83,-5550.24 E155.1@-885.83,-5374.96 ; E155.1@-885.83,-5254.96 E148.1@-885.83,-5079.69 ; E148.1@-885.83,-4959.69 E141.1@-885.83,-4784.41 ; E42.1@-885.83,-1711.65 E33.1@-885.83,-1536.38 ; E33.1@-885.83,-1416.38 -885.83,-1241.1 E17.1@-590.55,-945.83 ; E236.1@-590.55,-8918.27 -415.28,-8918.27 E237.1@-295.28,-8798.27 ; E236.1@-590.55,-8798.27 E229.1@-590.55,-8622.99 ; E229.1@-590.55,-8502.99 E222.1@-590.55,-8327.72 ; E222.1@-590.55,-8207.72 E215.1@-590.55,-8032.44 ; E215.1@-590.55,-7912.44 E208.1@-590.55,-7737.17 ; E208.1@-590.55,-7617.17 E201.1@-590.55,-7441.89 ; E181.1@-590.55,-6436.06 E175.1@-590.55,-6260.79 ; E175.1@-590.55,-6140.79 E169.1@-590.55,-5965.51 ; E169.1@-590.55,-5845.51 E163.1@-590.55,-5670.24 ; E249.1@-295.28,-9508.82 -221.42,-9508.82 -101.42,-9388.82 E250.1@0,-9388.82 ; E249.1@-295.28,-9388.82 E243.1@-295.28,-9213.54 ; E243.1@-295.28,-9093.54 E237.1@-295.28,-8918.27
Col2: Designator18.34 E5.1 E25.1 E34.1 E51.1 E61.1 E72.1 E83.1 E93.1 E103.1 E113.1 E123.1 E132.1 E133.1 E142.1 E149.1 E156.1 E157.1 E164.1 E170.1 E176.1 E187.1 E194.1 E195.1 E202.1 E209.1 E216.1 E223.1 E230.1 E231.1 E238.1 E244.1 E245.1 | length 16716.5
  Bottom Layer w10: Designator18.34@-6715.55,-7323.82 -4212.6,-7323.82 -1266.85,-7323.82 -1240.16,-7350.51 -1233.85,-7356.82 -787.77,-7802.9 -787.77,-8496.97 -715.67,-8569.06 -715.67,-8942.38 -378.39,-9279.66 -378.39,-9507.66 -324.39,-9561.66 24.95,-9561.66 94.49,-9492.13
  Bottom Layer w19.68: E132.1@-885.83,-4489.13 -765.83,-4369.13 E133.1@-590.55,-4369.13 ; E132.1@-885.83,-4369.13 E123.1@-885.83,-4193.86 ; E123.1@-885.83,-4073.86 E113.1@-885.83,-3898.58 ; E113.1@-885.83,-3778.58 E103.1@-885.83,-3603.31 ; E103.1@-885.83,-3483.31 E93.1@-885.83,-3308.03 ; E93.1@-885.83,-3188.03 E83.1@-885.83,-3012.76 ; E83.1@-885.83,-2892.76 E72.1@-885.83,-2717.48 ; E72.1@-885.83,-2597.48 E61.1@-885.83,-2422.2 ; E61.1@-885.83,-2302.2 E51.1@-885.83,-2126.93 ; E51.1@-885.83,-2006.93 -885.83,-1909.45 -590.55,-1614.17 E34.1@-590.55,-1536.38 ; E194.1@-590.55,-7146.61 -501.02,-7057.09 -383.86,-7057.09 -353.39,-7026.61 E195.1@-295.28,-7026.61 ; E194.1@-590.55,-7026.61 E187.1@-590.55,-6851.34 ; E187.1@-590.55,-6731.34 -590.55,-6673.23 -295.28,-6377.95 E176.1@-295.28,-6260.79 ; E156.1@-590.55,-5374.96 -415.28,-5374.96 E157.1@-295.28,-5254.96 ; E156.1@-590.55,-5254.96 E149.1@-590.55,-5079.69 ; E149.1@-590.55,-4959.69 E142.1@-590.55,-4784.41 ; E142.1@-590.55,-4664.41 E133.1@-590.55,-4489.13 ; E34.1@-590.55,-1416.38 E25.1@-590.55,-1241.1 ; E25.1@-590.55,-1121.1 -590.55,-1013.78 -442.91,-866.14 -442.91,-502.91 E5.1@-295.28,-355.28 ; E230.1@-295.28,-8622.99 -120,-8622.99 E231.1@0,-8502.99 ; E230.1@-295.28,-8502.99 E223.1@-295.28,-8327.72 ; E223.1@-295.28,-8207.72 E216.1@-295.28,-8032.44 ; E216.1@-295.28,-7912.44 E209.1@-295.28,-7737.17 ; E209.1@-295.28,-7617.17 E202.1@-295.28,-7441.89 ; E202.1@-295.28,-7321.89 E195.1@-295.28,-7146.61 ; E176.1@-295.28,-6140.79 E170.1@-295.28,-5965.51 ; E170.1@-295.28,-5845.51 E164.1@-295.28,-5670.24 ; E164.1@-295.28,-5550.24 E157.1@-295.28,-5374.96 ; E244.1@0,-9213.54 69.92,-9213.54 189.92,-9093.54 E245.1@295.28,-9093.54 ; E244.1@0,-9093.54 E238.1@0,-8918.27 ; E238.1@0,-8798.27 E231.1@0,-8622.99 ; 94.49,-9492.13 94.49,-9440.94 295.28,-9240.16 E245.1@295.28,-9213.54
Col3: Designator18.35 E11.1 E18.1 E26.1 E43.1 E52.1 E62.1 E73.1 E84.1 E94.1 E104.1 E114.1 E124.1 E125.1 E134.1 E143.1 E150.1 E151.1 E158.1 E165.1 E171.1 E182.1 E188.1 E189.1 E196.1 E203.1 E210.1 E217.1 E224.1 E225.1 E232.1 E239.1 E251.1 | length 16033.2
  Bottom Layer w10: Designator18.35@-6715.55,-7343.5 -4212.6,-7343.5 -1266.96,-7343.5 -1240.16,-7370.31 -1233.85,-7376.61 -801.77,-7808.7 -801.77,-8502.77 -729.67,-8574.86 -729.67,-8948.18 -392.39,-9285.45 -392.39,-9513.46 -330.19,-9575.66 228.43,-9575.66 E251.1@295.28,-9508.82
  Bottom Layer w19.68: E124.1@-590.55,-4193.86 -470.55,-4073.86 E125.1@-295.28,-4073.86 ; E124.1@-590.55,-4073.86 E114.1@-590.55,-3898.58 ; E114.1@-590.55,-3778.58 E104.1@-590.55,-3603.31 ; E104.1@-590.55,-3483.31 E94.1@-590.55,-3308.03 ; E94.1@-590.55,-3188.03 E84.1@-590.55,-3012.76 ; E84.1@-590.55,-2892.76 E73.1@-590.55,-2717.48 ; E73.1@-590.55,-2597.48 E62.1@-590.55,-2422.2 ; E62.1@-590.55,-2302.2 E52.1@-590.55,-2126.93 ; E52.1@-590.55,-2006.93 E43.1@-590.55,-1831.65 ; E43.1@-590.55,-1711.65 -590.55,-1661.42 -295.28,-1366.14 E26.1@-295.28,-1241.1 ; E188.1@-295.28,-6851.34 -247.01,-6851.34 -127.01,-6731.34 E189.1@0,-6731.34 ; E188.1@-295.28,-6731.34 E182.1@-295.28,-6556.06 ; E182.1@-295.28,-6436.06 -157.48,-6298.27 -157.48,-6192.91 0,-6035.43 E171.1@0,-5965.51 ; E150.1@-295.28,-5079.69 -120,-5079.69 E151.1@0,-4959.69 ; E150.1@-295.28,-4959.69 E143.1@-295.28,-4784.41 ; E143.1@-295.28,-4664.41 E134.1@-295.28,-4489.13 ; E134.1@-295.28,-4369.13 E125.1@-295.28,-4193.86 ; E26.1@-295.28,-1121.1 E18.1@-295.28,-945.83 ; E18.1@-295.28,-825.83 E11.1@-295.28,-650.55 ; E224.1@0,-8327.72 175.28,-8327.72 E225.1@295.28,-8207.72 ; E224.1@0,-8207.72 E217.1@0,-8032.44 ; E217.1@0,-7912.44 E210.1@0,-7737.17 ; E210.1@0,-7617.17 E203.1@0,-7441.89 ; E203.1@0,-7321.89 E196.1@0,-7146.61 ; E196.1@0,-7026.61 E189.1@0,-6851.34 ; E171.1@0,-5845.51 E165.1@0,-5670.24 ; E165.1@0,-5550.24 E158.1@0,-5374.96 ; E158.1@0,-5254.96 E151.1@0,-5079.69 ; E251.1@295.28,-9388.82 377.95,-9306.14 377.95,-9000.94 E239.1@295.28,-8918.27 ; E239.1@295.28,-8798.27 E232.1@295.28,-8622.99 ; E232.1@295.28,-8502.99 E225.1@295.28,-8327.72